# Altium PCB MAX3485.PcbDoc
Units mm, origin at the board's own origin, x right, y up, seen from the top; angles counter-clockwise.
Board outline 152.4 x 101.6 mm, 2 copper layers (Top Layer, Bottom Layer); 10 components, 8 nets, 33 pads, 0 vias.
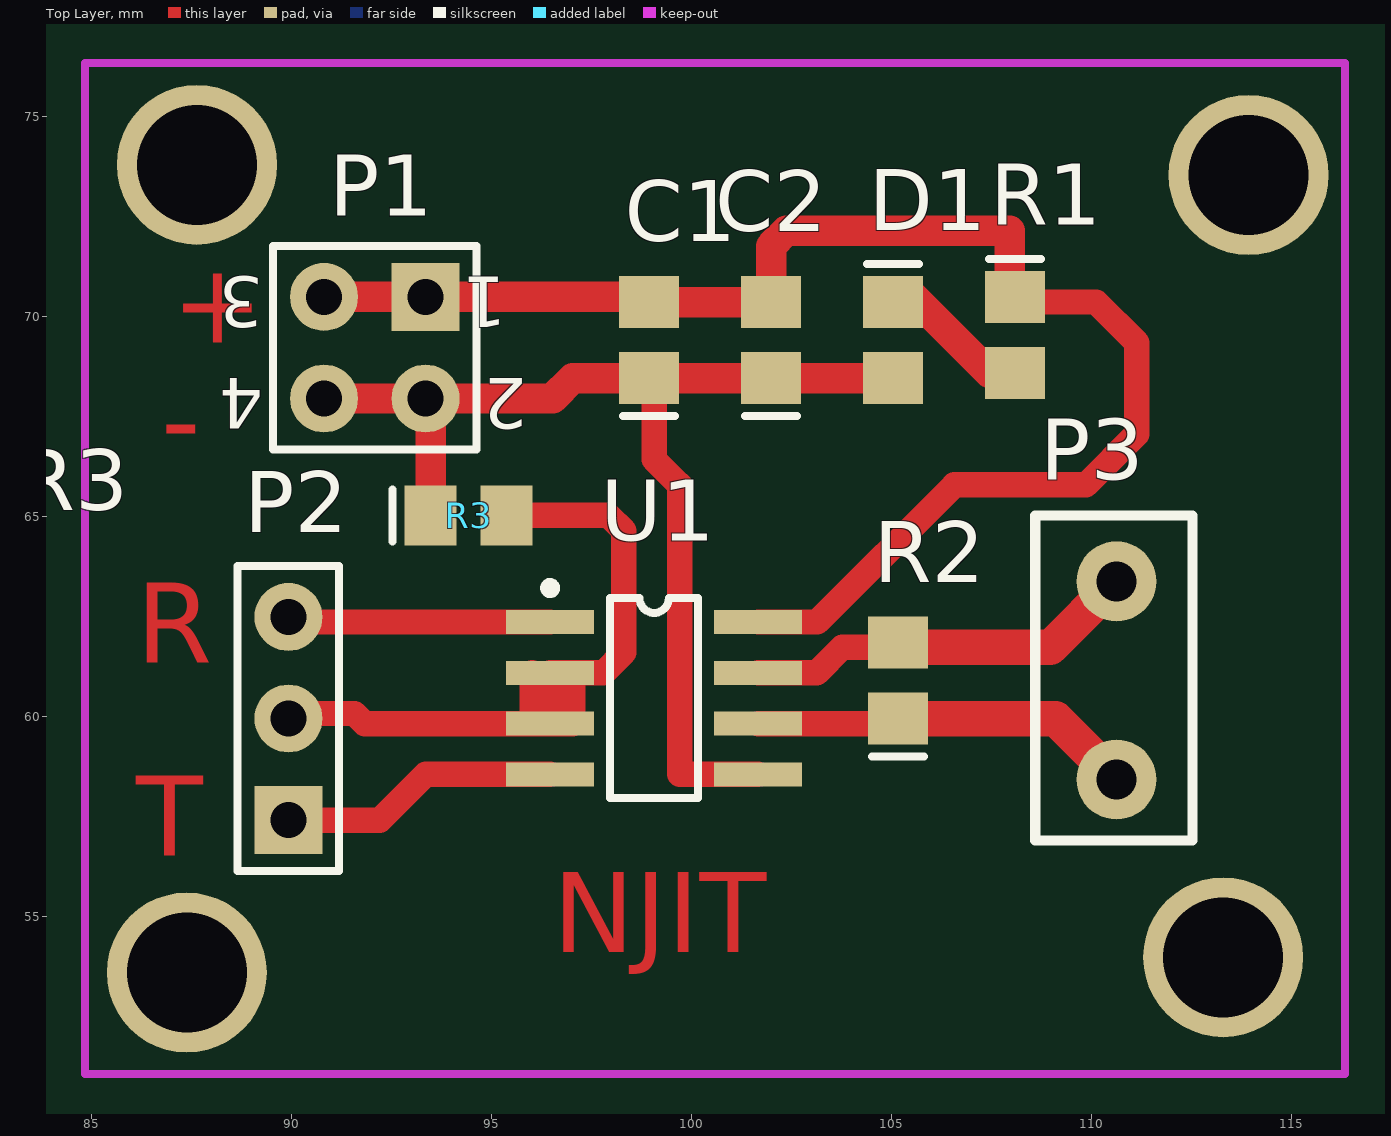
[diagram p0: Top Layer view]
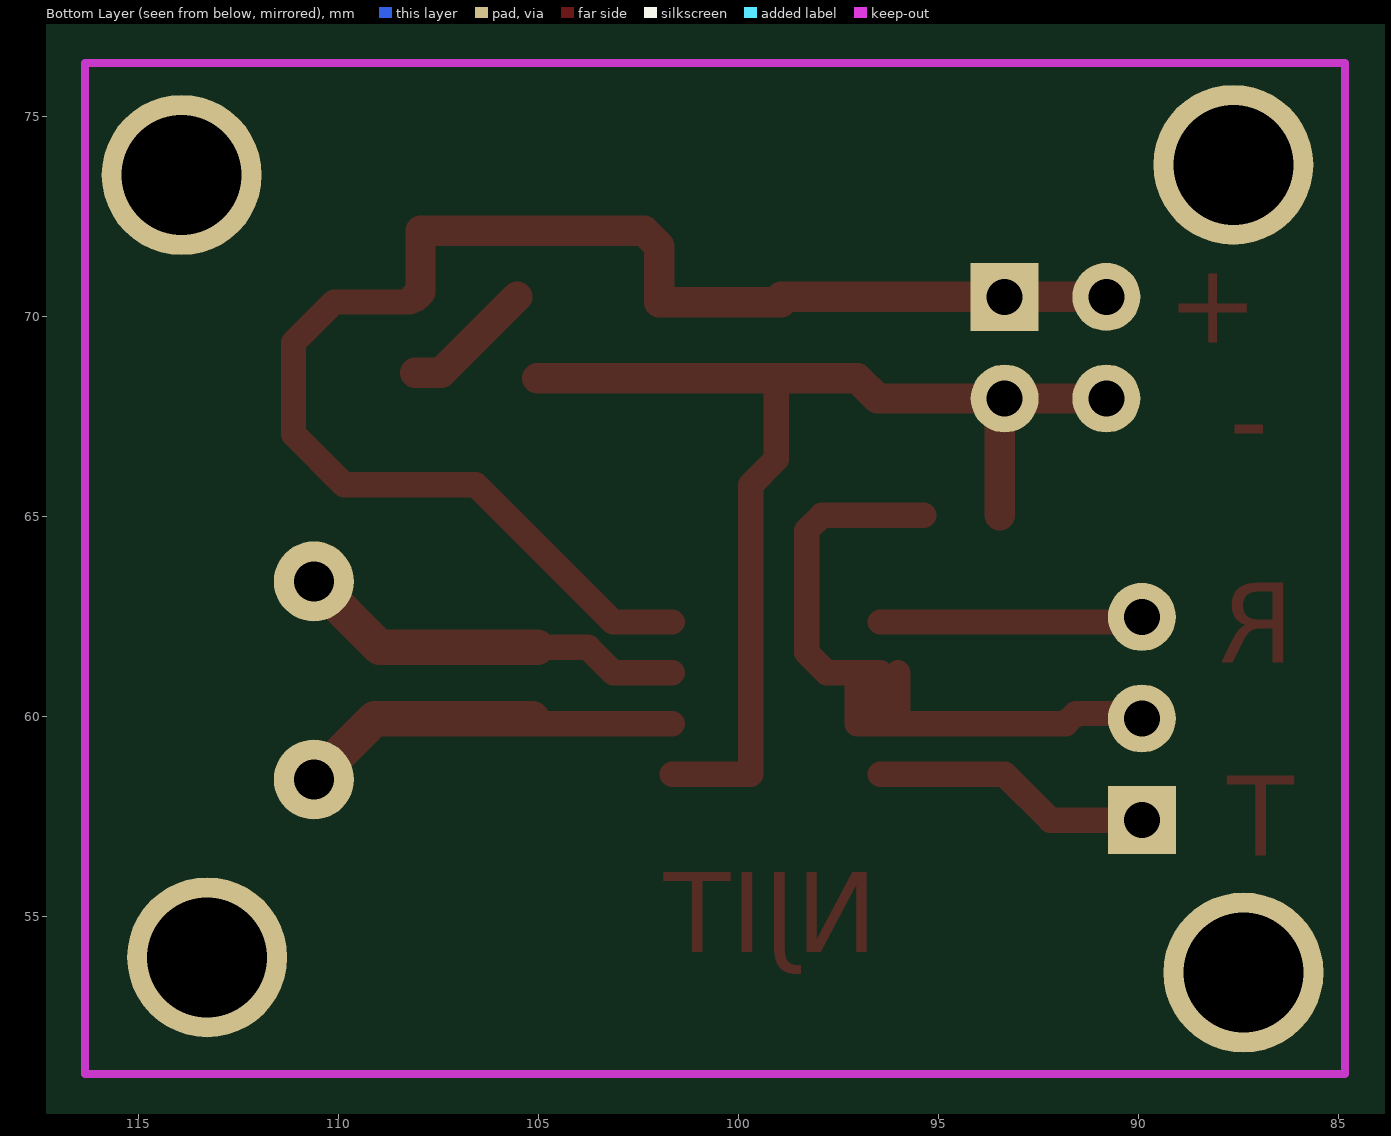
[diagram p1: Bottom Layer view, seen from below]

## Layer stack, top to bottom
Top Layer: signal copper 0.0356
Dielectric: dielectric 0.32, FR-4, Dk 4.8
Bottom Layer: signal copper 0.0356

## Board outline
25.4,25.4 177.8,25.4 177.8,127 25.4,127

## Design rules (kind name [scope] priority, off if disabled: settings)
Clearance [All] p1: gap=0.254
ComponentClearance [All] p1: gap=0.254 collisioncheckmode=3 verticalgap=0.254
PolygonConnect [All] p1: connectstyle=Relief reliefconductorwidth=0.254 reliefentries=4 polygonreliefangle="90 Angle"
RoutingVias [All] p1: holewidth=0.711 width=1.27 viastyle="Through Hole" minholewidth=0.711 minwidth=1.27 maxholewidth=0.711 maxwidth=1.27
SolderMaskExpansion [All] p1: expansion=0.102
TestPointUsage [All] p1: valid=0 allowmultiple=FALSE
Testpoint [All] p1: side=15 testpointundercomponent=TRUE minsize=1.016 maxsize=2.54 preferedsize=1.524 minholesize=0 maxholesize=1.016 preferedholesize=0.813 testpointgrid=0.025 style=1023 order=0123456789
Width [All] p1: maxlimit=1.016 minlimit=0.508 preferedwidth=0.762
18 further rules are at their usual default settings.

## Components (designator, comment, footprint, x,y, rotation, side; value= is the part's Value field where it differs from the comment)
C1 "Cap" C0805 98.933,69.403 r90 top
C2 "Cap" C0805 101.981,69.403 r90 top
D1 "LED0" C0805 105.029,69.403 r270 top
P1 "Header 2X2" HDR2X2 93.345,70.485 r180 top
P2 "Header 3" HDR1X3 89.916,57.404 r90 top
P3 "Header 2" 端子 110.744,60.96 r270 top
R1 "Res2" C0805 108.077,69.535 r270 top
R2 "Res2" C0805 105.156,60.894 r90 top
R3 "Res2" C0805 94.422,65.024 r0 top
U1 "MAX3485" SO8 99.06,60.452 r270 top

## Footprints (in the part's own frame and the unit in brackets; to place one, negate y for a bottom-side part, rotate by r counter-clockwise, add the part's x,y. Pads: shape width x height; smd on the part's side, far side on the other; paste and mask are expansions set on the pad)
C0805 [mm] "Chip Capacitor; Body 2.0 x 1.2 mm (LxW typ)"
  rect 1.3x1.5 smd: 1(-0.95,0) 2(0.95,0)
  silkscreen extent -1.9,-0.65 -1.9,0.65
HDR1X3 [mm] "Connector; Header; 3 Position"
  rect 1.7x1.7 hole 0.9: 1(0,0)
  round 1.7 hole 0.9: 2(2.54,0) 3(5.08,0)
  silkscreen extent -1.27,-1.27 6.35,1.27
HDR2X2 [mm] "Connector; Header; 2x2 Position"
  rect 1.7x1.7 hole 0.9: 1(0,0)
  round 1.7 hole 0.9: 2(0,2.54) 3(2.54,0) 4(2.54,2.54)
  silkscreen extent -1.27,-1.27 3.81,3.81
SO8 [mm] "Small Outline; 8 Leads; Body Width 3.9 mm; Pitch 1.27 mm"
  rect 0.6x2.2 smd: 1(-1.905,-2.6) 2(-0.635,-2.6) 3(0.635,-2.6) 4(1.905,-2.6) 5(1.905,2.6) 6(0.635,2.6) 7(-0.635,2.6) 8(-1.905,2.6)
  silkscreen extent -2.88,-2.72 2.5,1.1
端子 [mm]
  round 2 hole 1: 1(-2.413,-0.127) 2(2.54,-0.127)
  silkscreen extent -4.06,-2.16 4.06,1.78

## Part data
C1 C2: "Capacitor"
D1: "Typical INFRARED GaAs LED"
P1: "Header, 2-Pin, Dual row"
P2: "Header, 3-Pin"
P3: "Header, 2-Pin"
R1 R2 R3: "Resistor"
U1: library part Component_1

## Free pads (board coordinates)
  round 4 hole 3: 0(87.63,73.787) 1(113.284,53.975) 2(113.919,73.533) 3(87.376,53.594)

## Nets (pads, with @x,y where several pads share a name; then routed paths per layer and width w, separated by ;. In a path a pad name is that pad's centre, name@x,y a point inside that pad or via, vN(x,y) a via of type N, cw(c..) or ccw(c..) an arc to the next point about the centre after c; other vN are vias at no path point)
GND: C1.1 C2.1 D1.2 P1.2 P1.4 R3.1 U1.5 | length 29.6
  Top Layer w0.635: C1.1 99.06,68.326 99.06,66.421 99.695,65.786 99.695,58.547 U1.5
  Top Layer w0.762: P1.4 P1.2 ; R3.1 93.472,67.818 P1.2 ; D1.2 C2.1 C1.1 97.028,68.453 96.52,67.945 P1.2
NetD1_1: D1.1 R1.2 | length 3.3
  Top Layer w0.762: D1.1@105.537,70.485 107.437,68.585 R1.2
NetP2_1: P2.1 U1.4 | length 7
  Top Layer w0.635: P2.1 92.202,57.404 93.345,58.547 U1.4
NetP2_2: P2.2 R3.2 U1.2 U1.3 | length 19.3
  Top Layer w0.635: P2.2 90.043,60.071 91.567,60.071 91.821,59.817 U1.3@95.885,59.817 ; R3.2 97.917,65.024 98.298,64.643 98.298,61.595 97.79,61.087 U1.2@97.028,61.087 ; U1.2@96.012,61.087 96.012,59.944 U1.3@95.885,59.817 ; U1.3@95.885,59.817 U1.3 ; U1.3 U1.2 U1.2@97.028,61.087 ; U1.3 97.028,59.817 U1.2@97.028,61.087
NetP2_3: P2.3 U1.1 | length 6.6
  Top Layer w0.635: P2.3 90.043,62.357 U1.1
NetP3_1: P3.1 R2.2 U1.7 | length 10.1
  Top Layer w0.635: U1.7 103.124,61.087 103.759,61.722 105.034,61.722 R2.2
  Top Layer w0.889: R2.2@105.034,61.722 105.156,61.722 108.966,61.722 P3.1
NetP3_2: P3.2 R2.1 U1.6 | length 9.6
  Top Layer w0.635: U1.6 105.029,59.817 R2.1
  Top Layer w0.889: R2.1 109.093,59.944 P3.2
VCC: C1.2 C2.2 P1.1 P1.3 R1.1 U1.8 | length 37.8
  Top Layer w0.635: U1.8 103.137,62.357 106.566,65.786 109.855,65.786 111.125,67.056 111.125,69.342 110.109,70.358 108.204,70.358 R1.1
  Top Layer w0.762: P1.3 P1.1 98.933,70.485 C1.2 C2.2 101.981,71.755 102.362,72.136 107.95,72.136 107.95,70.612 R1.1

## Keep-outs
Keep-Out Layer:
  lines w0.2: 84.836,51.054 84.836,76.327 116.332,76.327 116.332,51.054 84.836,51.054

## Other copper
Top Layer:
  text "+" at 86.995,69.342 h2
  text "-" at 86.741,66.421 h2
  text "R" at 86.106,61.341 h2
  text "T" at 86.106,56.515 h2
  text "NJIT" at 96.52,54.102 h2

## Text inside footprints (layer, text, board x,y; h text height)
P1: Top Overlay "1" at 95.377,70.993 h1.27 r180; Top Overlay "2" at 95.885,68.453 h1.27 r180; Top Overlay "4" at 89.281,68.453 h1.27 r180; Top Overlay "3" at 89.281,70.993 h1.27 r180